# Allegro board RPI_DYNAMIXEL.brd
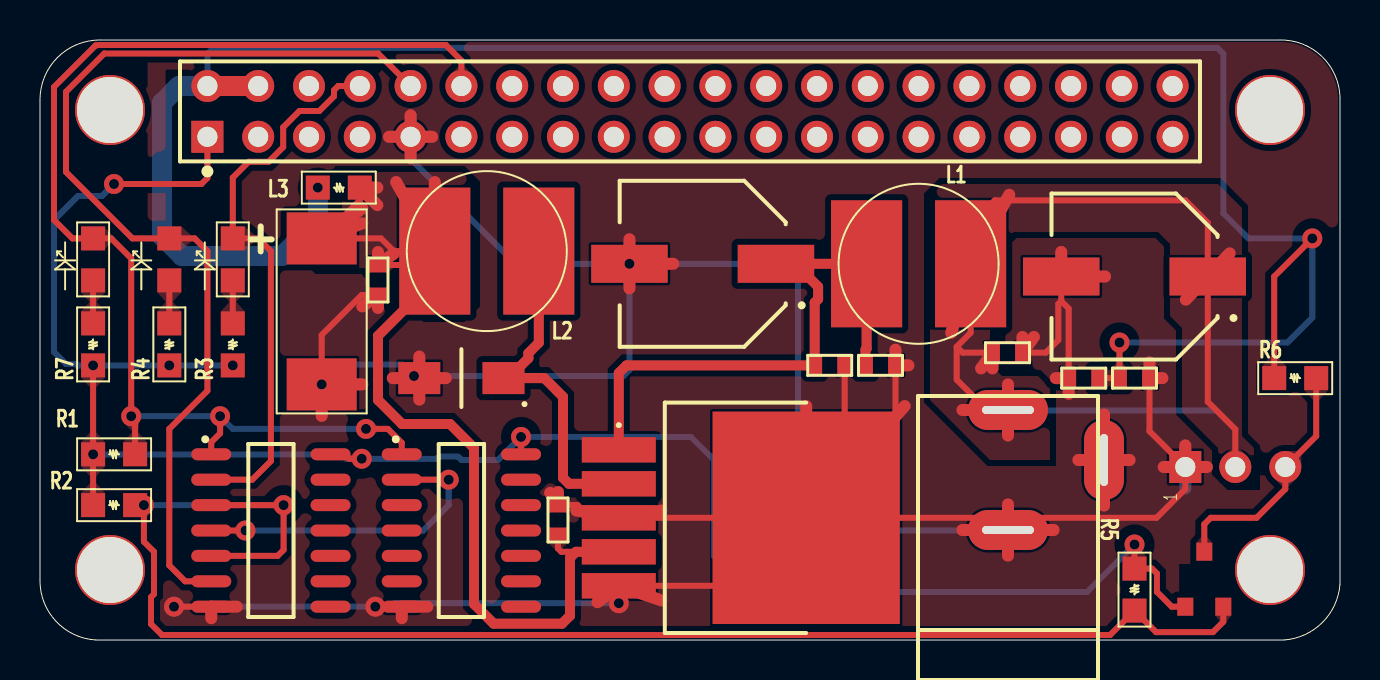
[diagram p0: board, top side]
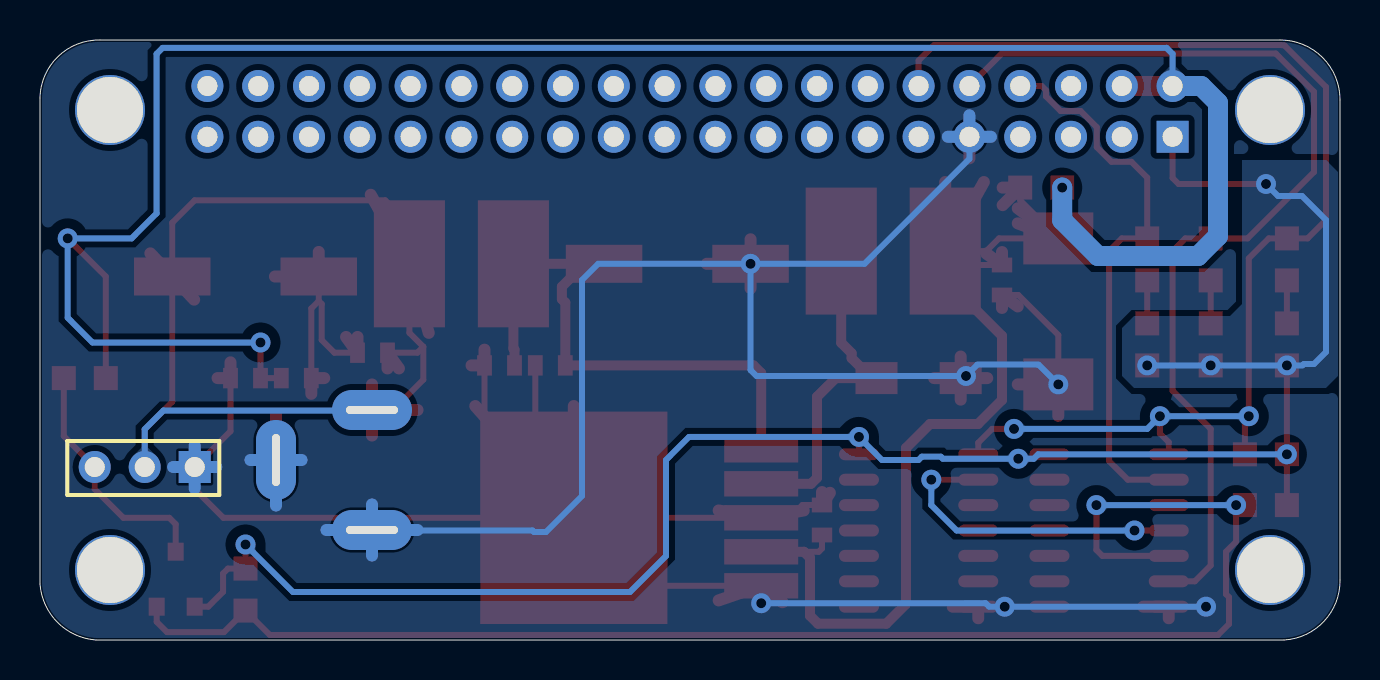
[diagram p1: board, bottom side, seen from below]

Outline 65 x 30 mm; copper layers: TOP, BOTTOM. Coordinates in mm from the lower left corner of the outline.
Outline path: 0,27 arc(0.87,29.13) 3,30 62,30 arc(64.1,29.17) 65,27.1 65,2.8 arc(64.12,0.88) 62.2,0 2.8,0 arc(0.8,0.94) 0,3 0,27

## Design rules (mm)
constraint set DEFAULT: min track width 0.3

## Placement (name value [footprint] x y rotation side)
C1  470uF  [CAP_SMD_SIZEF]  54.73 18.18 180 top
C2  C104  [CAP_SMD_0603]  48.38 14.37 0 top
C3  470uF  [CAP_SMD_SIZEF]  33.13 18.81 180 top
C4  C104  [CAP_SMD_0603]  42.02 13.73 0 top
C5  C104  [CAP_SMD_0603]  39.48 13.73 0 top
C6  100uF  [TANTALUM_7343]  14.09 20.08 90 top
C7  C104  [CAP_SMD_0603]  54.73 13.1 0 top
C8  C104  [CAP_SMD_0603]  52.19 13.1 180 top
C9  C104  [CAP_SMD_0603]  16.9 18 270 top
C10  C104  [CAP_SMD_0603]  25.9 6 90 top
D1  LED  [LED_SMD_0805]  9.64 20.08 270 top
D2  LED  [LED_SMD_0805]  6.46 20.08 270 top
D3  LED  [LED_SMD_0805]  2.66 20.08 270 top
D4  ss34  [1N4007_SMD]  21.07 13.1 180 top
J1  CON3  [CONNECTOR3PINS]  58.53 8.65 0 top
J2  RPI_HEADER  [J2_40_254]  8.37 25.16 0 top
J3  POWER IN  [DC_JACK_25_DIP]  48.4 5.5 90 top
L1  6R8  [L81X73X55]  43.93 18.81 0 top
L2  100uH/3A  [L81X73X55]  22.34 19.45 0 top
L3  30ohM  [RES_SMD_0805]  15.99 22.62 180 top
NOREF  -  [unnamed]  61.5 26.5 0 top
NOREF#2  -  [unnamed]  61.5 3.5 0 top
NOREF#3  -  [unnamed]  3.5 26.5 0 top
NOREF#4  -  [unnamed]  3.5 3.5 0 top
Q1  2302  [SOT23]  57.27 1.66 180 top
R1  10K  [RES_SMD_0805]  2.66 9.29 0 top
R2  10K  [RES_SMD_0805]  2.66 6.74 0 top
R3  330R  [RES_SMD_0805]  9.64 13.73 90 top
R4  330R  [RES_SMD_0805]  6.46 13.73 90 top
R5  4K7  [RES_SMD_0805]  54.73 3.57 270 top
R6  4K7  [RES_SMD_0805]  61.71 13.1 0 top
R7  330R  [RES_SMD_0805]  2.66 13.73 90 top
U1  74HC126_SOIC14  [SOIC14]  11.55 5.47 0 top
U2  74HC04  [SOIC14]  21.07 5.47 0 top
U4  LM2576/TO_0  [TO263_5]  35.04 6.11 0 top

## Library data of the parts
C1 C3 C6 = CAPACITOR POL
C2 C4 C5 C7-C10 = CAP NP
D1-D3 = LED
D4 = DIODE_0
J1 = CON3
J2 = RPI_HEADER
J3 = DC-JACK_0
L1-L3 = INDUCTOR
Q1 = IRF1010E/TO_0
R1-R7 = R
U1 = 74HC126_SOIC14
U2 = 74HC04
U4 = LM2576/TO_0

## Footprints (pads in the part's own frame, mm; a bottom-side part is the same pattern mirrored in y, then rotated)
1N4007_SMD
  rect 2.1x1.6 smd: A(2.104,0) C(-2.104,0)
CAP_SMD_0603
  rect 0.74x1.02 smd: 1(-0.75,0) 2(0.75,0)
CAP_SMD_SIZEF
  rect 3.825x1.9 smd: 1(-3.663,0) 2(3.663,0)
CONNECTOR3PINS
  rect 1.6x1.6 hole 1: 1(-1.27,0)
  round 1.6 hole 1: 2(1.23,0) 3(3.73,0)
DC_JACK_25_DIP
  oval 2x4 hole 0.4x2.6: 1(0,0) 3(6,0)
  oval 4x2 hole 2.6x0.4: 2(3.5,-4.8)
J2_40_254
  rect 1.6x1.6 hole 1: 1(0,0)
  round 1.6 hole 1: 2(0,2.54) 3(2.54,0) 4(2.54,2.54) 5(5.08,0) 6(5.08,2.54) 7(7.62,0) 8(7.62,2.54) 9(10.16,0) 10(10.16,2.54) 11(12.7,0) 12(12.7,2.54) 13(15.24,0) 14(15.24,2.54) 15(17.78,0) 16(17.78,2.54) 17(20.32,0) 18(20.32,2.54) 19(22.86,0) 20(22.86,2.54) 21(25.4,0) 22(25.4,2.54) 23(27.94,0) 24(27.94,2.54) 25(30.48,0) 26(30.48,2.54) 27(33.02,0) 28(33.02,2.54) 29(35.56,0) 30(35.56,2.54) 31(38.1,0) 32(38.1,2.54) 33(40.64,0) 34(40.64,2.54) 35(43.18,0) 36(43.18,2.54) 37(45.72,0) 38(45.72,2.54) 39(48.26,0) 40(48.26,2.54)
L81X73X55
  rect 3.556x6.35 smd: 1(2.6,0) 2(-2.6,0)
LED_SMD_0805
  rect 1.2x1.2 smd: 1(0,0) 2(2.1,0)
RES_SMD_0805
  rect 1.2x1.2 smd: 1(0,0) 2(2.1,0)
SOIC14
  oval 2x0.6 smd: 1(-2.982,3.81) 2(-2.982,2.54) 3(-2.982,1.27) 4(-2.982,0) 5(-2.982,-1.27) 6(-2.982,-2.54) 7(-2.982,-3.81) 8(2.982,-3.81) 9(2.982,-2.54) 10(2.982,-1.27) 11(2.982,0) 12(2.982,1.27) 13(2.982,2.54) 14(2.982,3.81)
SOT23
  rect 0.8x0.9 smd: 1(0,0) 2(-1.9,0) 3(-0.95,-2.75)
TANTALUM_7343
  rect 2.6x3.5 smd: 1(0,0) 2(-7.3,0)
TO263_5
  rect 3.7x1.27 smd: 1(-6.1,3.4) 2(-6.1,1.7) 3(-6.1,0) 4(-6.1,-1.7) 5(-6.1,-3.4)
  rect 9.36x10.62 smd: 6(3.27,0)
unnamed
  round 3.5 hole 3.3: (0,0)

## Nets
3V3: J2.1 Q1.1 R1.1 R2.1 R3.1 R4.1 R5.1 R7.1 U1.14(VCC) U2.14(VCC)
5V: C7.1 C8.1 J2.2 J2.4 L3.2 R6.1
12V: C1.1 C2.1 J1.2 J3.3(VCC) L1.1
GND: C1.2 C2.2 C3.2 C4.2 C5.2 C6.2 C7.2 C8.2 C9.2 C10.2 D4.A J1.1 J2.9 J3.1 J3.2 U1.7 U2.7 U4.3 U4.5 U4.6
DATA_3V3: Q1.2(S) R2.2 R5.2 U1.3 U1.5
DATA_5V: J1.3 Q1.3 R6.2
DIR: D3.1(CATHODE) J2.12 R1.2 U1.1 U2.1
RX: D2.1(CATHODE) J2.10 U1.6
TX: D1.1(CATHODE) J2.8 U1.2
N720596: U1.4 U2.2
N724104: C6.1 C9.1 C10.1 L2.2 L3.1 U4.4
N724160: C3.1 C4.1 C5.1 L1.2 U4.1(VIN)
N724250: D4.C(K) L2.1 U4.2
N6211430: D1.2 R3.2
N6216060: D2.2 R4.2
N6216750: D3.2 R7.2

Pads without a net: J2 3 5 6 7 11 13 14 15 16 17 18 19 20 21 22 23 24 25 26 27 28 29 30 31 32 33 34 35 36 37 38 39 40; U1 8 9 10 11 12 13; U2 3 4 5 6 8 9 10 11 12 13

## Via types
v1: diameter 1, hole 0.5, TOP to BOTTOM, 24 vias

## Routing (per net, layer and track width the routed paths; a pad name or vN(x,y) marks a point on that pad's centre or on a via; arc(x,y) is an arc through that point)
3V3: length 100.8
  TOP w0.3: v1(3.7,22.8) 8.07,22.8 8.37,23.1 J2.1 ; U1.14 15.23,9.29 15.45,9.06 v1(16.09,9.06) ; Q1.1 56.59,1.66 55.85,2.41 55.85,3.32 55.6,3.57 R5.1 v1(54.73,4.78) ; U2.14 v1(24.05,10.15) ; v1(2.66,13.73) v1(2.66,9.29) R2.1
  BOTTOM w0.3: v1(2.66,9.29) 15.09,9.29 15.31,9.06 v1(16.09,9.06) 19.86,9.06 19.96,9.16 20.91,9.16 21.08,9 22.9,9 v1(24.05,10.15) 32.55,10.15 33.7,9 33.7,4.2 35.5,2.4 52.35,2.4 v1(54.73,4.78) ; v1(9.64,13.73) v1(6.46,13.73) v1(2.66,13.73) 1.88,13.73 1.81,13.8 1.3,13.8 0.7,14.4 0.7,21 1.9,22.2 3.1,22.2 v1(3.7,22.8)
5V: length 112.7
  TOP w0.3: R6.1 61.71,18.18 v1(63.61,20.08) ; C8.1 C7.1 v1(53.98,14.88)
  TOP w1: J2.2 J2.4
  BOTTOM w0.3: v1(53.98,14.88) 62.38,14.88 63.61,16.11 v1(63.61,20.08) 60.42,20.08 59.17,21.33 59.17,29.3 58.87,29.61 8.67,29.61 8.37,29.3 J2.2
  BOTTOM w1: v1(13.89,22.62) 13.89,20.99 12.1,19.2 7.1,19.2 6.1,20.2 6.1,26.86 6.94,27.7 J2.2
12V: length 69.7
  TOP w0.3: 45.84,14.66 45.84,13.02 47.38,11.47 48.38,11.47 ; 45.84,14.66 46.53,15.36 L1.1 46.53,20.77 47.74,21.98 57.27,21.98 58.39,20.86 58.39,11.91 59.77,10.54 J1.2 ; 45.84,14.66 46.13,14.37 C2.1
  TOP w0.6: 48.46,22.26 L1.1 45.56,15.36 ; 47.62,13.58 C2.1 47.05,13.58 ; 57.29,17.02 59.48,19.33 ; 48.4,10.22 J3.3 ; J3.3 46.12,11.5 ; J3.3 48.4,12.78
  BOTTOM w0.3: 48.38,11.47 58.83,11.47 59.77,10.54 J1.2
GND: length 264.2
  TOP w0.3: C8.2 51.44,16.58 51.06,16.95 ; v1(14.09,12.78) 14.09,15.25 16.09,17.25 C9.2 ; U4.6 55.83,6.11 57.27,7.55 J1.1 55.48,10.44 C7.2 ; U4.6 U4.3 27.52,6.11 26.88,6.75 C10.2 ; U4.6 34.91,2.71 U4.5 v1(28.94,1.84) ; U4.6 40.23,8.04 ; v1(16.77,1.66) U2.7 ; 40.23,8.04 42.77,10.57 C4.2 ; 40.23,8.04 C5.2 ; 51.06,16.95 C1.2 ; 51.06,16.95 50.91,16.8 50.91,15 50.28,14.37 C2.2 ; U1.7 v1(6.7,1.66)
  TOP w0.6: 25.9,7.4 C10.2 25.51,7.36 ; 31.07,6.48 U4.3 26.81,6.48 ; 56.19,8.65 J1.1 ; J1.1 58.34,8.65 ; J1.1 57.27,9.73 ; 48.4,4.22 J3.1 ; J3.1 46.12,5.5 ; J3.1 48.4,6.78 ; J3.1 50.68,5.5 ; 17.64,13.1 D4.A ; D4.A 18.97,14.17 ; D4.A 20.29,13.1 ; D4.A 18.97,12.02 ; 38.31,11.7 U4.6 43.23,11.7 ; 18.53,24.08 J2.9 ; J2.9 19.61,25.16 ; J2.9 17.45,25.16 ; J2.9 18.53,26.24 ; 51.06,19.4 C1.2 53.25,18.18 ; J3.2 54.48,9 ; J3.2 51.92,9 ; J3.2 53.2,11.28 ; J3.2 53.2,6.72 ; 14.09,11.2 v1(14.09,12.78) 16.11,12.78 ; 16.9,16.6 C9.2 16.11,16.68 ; 29.47,17.58 v1(29.47,18.81) ; v1(29.47,18.81) 29.47,20.04 ; v1(29.47,18.81) 31.66,18.81 ; 55.48,13.88 C7.2 56.12,13.1 ; 49.12,15.15 C2.2 49.7,15.15 ; 19.36,1.66 U2.7 18.09,1.09 ; 8.56,1.09 U1.7 9.84,1.66 ; 51.44,12.31 C8.2 50.79,13.1 ; 27.88,1.89 U4.5 31.07,1.98 ; 42.77,14.52 C4.2 43.42,13.73
  BOTTOM w0.3: 48.38,5.47 40.38,5.47 40.3,5.4 39.7,5.4 37.9,7.2 37.9,18 37.09,18.81 v1(29.47,18.81) ; J2.9 18.53,24.06 23.78,18.81 v1(29.47,18.81) ; v1(29.47,18.81) 29.47,13.5 29.17,13.2 v1(18.7,13.2) 18.13,13.77 15.07,13.77 v1(14.09,12.78) ; v1(6.7,1.66) v1(16.77,1.66) 17.54,1.66 17.72,1.84 v1(28.94,1.84)
  BOTTOM w0.6: 53.2,6.72 J3.2 ; J3.2 54.48,9 ; J3.2 51.92,9 ; J3.1 50.68,5.5 ; J3.1 48.4,6.78 ; J3.1 46.12,5.5 ; J3.1 48.4,4.22 ; 57.27,7.57 J1.1 ; J1.1 58.34,8.65 ; J1.1 57.27,9.73 ; J1.1 56.19,8.65 ; J2.9 18.53,26.24 ; J2.9 17.45,25.16 ; J2.9 19.61,25.16
DATA_3V3: length 79
  TOP w0.3: U1.5 11.88,4.21 12.18,4.51 v1(12.18,6.74) U1.3 ; R2.2 v1(5.2,6.74) 5.2,4.92 5.7,4.41 5.7,2.29 5.55,2.14 5.55,0.8 6.1,0.25 53.5,0.25 R5.2 55.8,0.39 58.65,0.39 59.16,0.91 Q1.2
  BOTTOM w0.3: v1(5.2,6.74) v1(12.18,6.74)
DATA_5V: length 12.3
  TOP w0.3: Q1.3 58.22,5.79 58.53,6.11 60.83,6.11 62.27,7.55 J1.3 63.81,10.2 R6.2
DIR: length 60.7
  TOP w0.3: v1(9,11.19) 9,10.33 8.56,9.89 U1.1 ; J2.12 21.07,28.97 20.29,29.75 2.97,29.75 2.78,29.73 0.7,27.65 0.7,21 1.62,20.08 D3.1 3.56,20.08 4.56,19.08 v1(4.56,11.19) 4.75,11 R1.2 ; U2.1 18.09,9.86 17.39,10.55 v1(16.3,10.55)
  BOTTOM w0.3: v1(16.3,10.55) 9.64,10.55 v1(9,11.19) v1(4.56,11.19)
RX: length 50.3
  TOP w0.3: 8.56,2.94 7.26,2.94 6.46,3.73 6.46,10.55 8.37,12.46 8.37,19.45 7.73,20.08 D2.1 4.62,20.08 1.3,23.4 1.3,27.41 3.21,29.32 16.91,29.32 J2.10
TX: length 28.1
  TOP w0.3: J2.8 14.91,27.7 14.7,27.49 14.7,27.18 13.97,26.45 12.97,26.45 12.16,25.64 12.16,24.64 11.43,23.91 10.43,23.91 9.64,23.12 D1.1 10.91,20.08 11.55,19.45 11.55,8.95 10.61,8.02 U1.2
N720596: length 16
  TOP w0.3: U1.4 v1(10.27,5.47) ; v1(20.44,8.02) U2.2
  BOTTOM w0.3: v1(20.44,8.02) 20.44,6.74 19.16,5.47 v1(10.27,5.47)
N724104: length 62.9
  TOP w0.3: L3.1 15.99,21.98 C6.1 17.05,20.08 17.69,19.45 L2.2 19.05,18.75 C9.1 ; 26.8,4.41 26.07,4.41 25.9,4.58 C10.1
  TOP w0.5: U4.4 26.8,4.41 26.5,4.11 26.5,1.21 26.1,0.81 22.69,0.81 21.7,1.8 21.7,9.6 20.5,10.8 18.1,10.8 16.9,12 16.9,15.21 19.74,18.05 L2.2
  TOP w0.6: 17.69,19.32 C9.1 16.9,19.4 ; 16.11,20.83 C6.1 16.11,21.59 ; 19.74,22.9 L2.2 17.81,22.9 ; 16.87,21.74 L3.1 16.87,22.62
N724160: length 29.1
  TOP w0.3: 37.76,18.81 C3.1
  TOP w0.5: U4.1 28.94,13.35 29.32,13.73 C5.1 38.73,16.87 38.91,17.04 38.91,17.66 37.76,18.81 L1.2 41.33,14.57 41.27,14.52 C4.1
N724250: length 17.3
  TOP w0.3: 23.42,13.1 23.17,13.1
  TOP w0.5: L2.1 24.94,14.86 24.42,14.34 24.42,14.09 23.42,13.1 25.21,13.1 26.15,12.16 26.15,8.11 26.45,7.81 U4.2
N6211430: length 2.1
  TOP w0.3: D1.2 R3.2
N6216060: length 2.1
  TOP w0.3: D2.2 R4.2
N6216750: length 2.1
  TOP w0.3: D3.2 R7.2

## Copper pours and planes (outline as drawn; the poured copper is in the pictures)
3V3 on BOTTOM: 0.7,12.6 0.1,13.2 0.1,23.4 0.7,24 4.9,24 4.9,16.8 5.5,16.2 10.3,16.2 10.9,15.6 10.9,13.2 10.3,12.6
12V on TOP: 50.5,12.6 50.5,9 47.5,9 44.5,12 44.5,22.2 45.1,22.8 58.9,22.8 60.1,21.6 60.1,10.2 60.7,9.6 60.7,7.8 59.5,7.8 58.9,8.4 58.9,9.6 57.1,11.4 57.1,15.6 56.5,16.2 56.5,19.8 55.9,20.4 48.7,20.4 47.5,19.2 47.5,13.8 48.1,13.2 49.9,13.2
GND on TOP: 2.8,0.1 0.87,1.01 0.1,3 0.1,27 0.94,29.06 3,29.9 62,29.9 64.03,29.1 64.9,27.1 64.9,2.8 64.05,0.95 62.2,0.1 ; 19 cut-outs
GND on BOTTOM: 2.8,0.1 0.87,1.01 0.1,3 0.1,27 0.94,29.06 3,29.9 62,29.9 64.03,29.1 64.9,27.1 64.9,2.8 64.05,0.95 62.2,0.1
N724104 on TOP: 15.1,23.4 21.1,23.4 21.7,22.8 21.7,16.8 21.1,16.2 19.3,16.2 18.1,17.4 18.1,18.6 13.9,18.6 12.7,19.8 12.7,20.4 13.9,21.6 15.1,21.6

Small or netless copper shapes (teardrops, artwork), in the pictures only: 53 on TOP, 28 on BOTTOM
